# Altium PCB FS IA project.PcbDoc
Units mil, origin at the board's own origin, x right, y up, seen from the top; angles counter-clockwise.
Board outline 2371.06 x 649.61 mil, 2 copper layers (Top Layer, Bottom Layer), stack 65.792 mil thick; 5 components, 7 nets, 23 pads, 0 vias.
Unrouted connection lines stored in the file: 4.
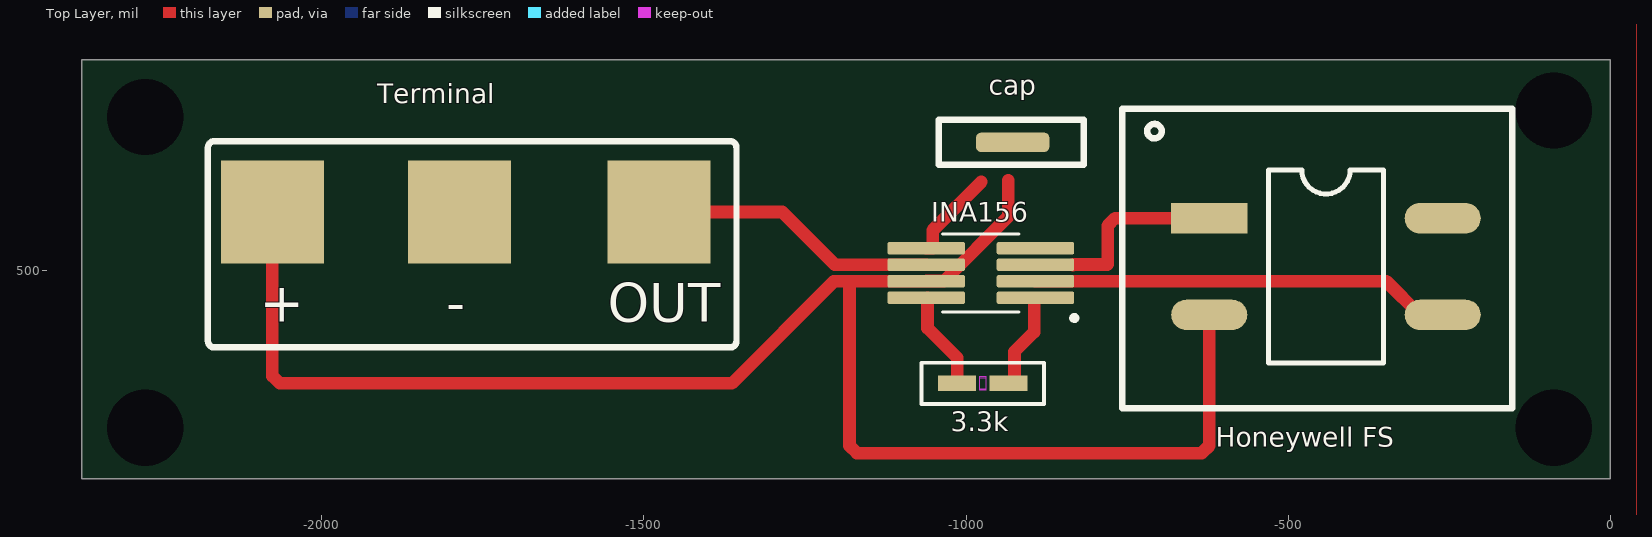
[diagram p0: Top Layer view]
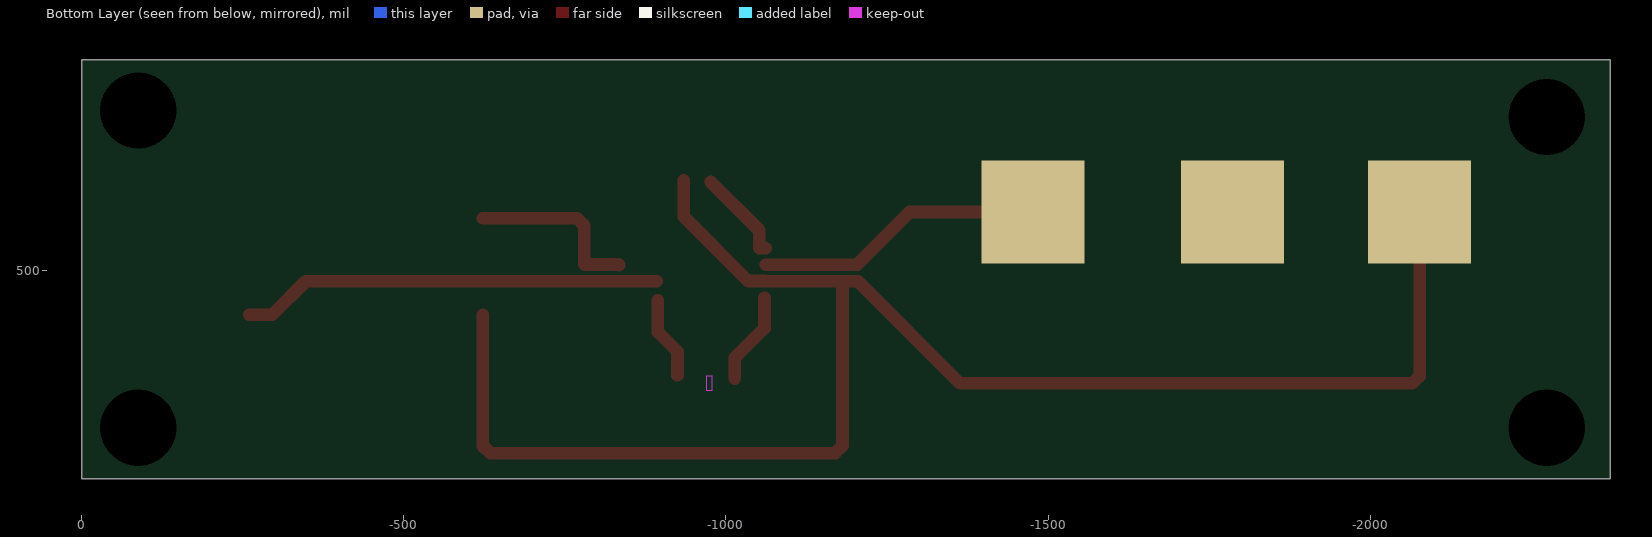
[diagram p1: Bottom Layer view, seen from below]

## Layer stack, top to bottom
Top Solder: solder mask 0.4, Solder Resist, Dk 3.5
Top Layer: signal copper 1.4
Dielectric 1: dielectric 62.9921, FR-4, Dk 4.8
Bottom Layer: signal copper 1.4
Bottom Solder: solder mask 0.4, Solder Resist, Dk 3.5

## Board outline
-2372.05,177.17 -0.98,177.17 -0.98,826.77 -2372.05,826.77

## Design rules (kind name [scope] priority, off if disabled: settings)
Clearance [All] p1: gap=0.4 ignorepadtopadclearanceinfootprint=TRUE
PolygonConnect [All] p1: connectstyle=Relief reliefconductorwidth=20 reliefentries=4 polygonreliefangle="90 Angle" airgapwidth=10
RoutingVias [All] p1: holewidth=28 width=50 viastyle="Through Hole" minholewidth=28 minwidth=50 maxholewidth=28 maxwidth=50
SolderMaskExpansion [All] p1: expansion=4 istentingtop=FALSE
Width [All] p1: maxlimit=29.53 minlimit=9.84 preferedwidth=19.68
30 further rules are at their usual default settings.

## Components (designator, comment, footprint, x,y, rotation, side; value= is the part's Value field where it differs from the comment)
3.3k "WR04X3301FTL" RES_WR04_WRE-M -974.41,324.8 r0 top
cap "CL05A104KA5NNNC" CAPC1005X55N -927.95,698.82 r180 top (schematic designator C?)
"Honeywell FS" "FSS010WNGR" "FSS010 - duplicate" -623.03,581.1 r0 top
INA156 "INA156EA/2K5" SOP65P490X110-8N -977.36,496.06 r180 top
Terminal "1935174" "SUPPLY TERMINAL" -2176.38,690.55 r0 top

## Footprints (in the part's own frame and the unit in brackets; to place one, negate y for a bottom-side part, rotate by r counter-clockwise, add the part's x,y. Pads: shape width x height; smd on the part's side, far side on the other; paste and mask are expansions set on the pad)
CAPC1005X55N [mil]
  rrect53% 80x30 smd: 1(-16.93,0) 2(16.93,0)
  silkscreen extent -110,-35 115,35, body extent -20,-10 20,10, height 22
"FSS010 - duplicate" [mm]
  rect 3x1.2 smd: 1(0,0)
  oval 3x1.2 smd: 2(0,-3.81) 3(9.2,-3.81) 4(9.2,0)
  silkscreen extent -3.43,-7.49 11.94,4.32
RES_WR04_WRE-M [mil]
  rect 59.06x24 smd paste+0 mask+0: 1(-40,0) 2(40,0)
  Top Layer keep-out region: -4.5,-9 -4.5,9 4.5,9 4.5,-9
  Keep-Out Layer region: -4.5,-11 -4.5,11 4.5,11 4.5,-11
  silkscreen extent -95,-32 95,32, body extent -21,-11 21,11, height 16
SOP65P490X110-8N [mm]
  rrect25% 3.048x0.48 smd: 1(-2.15,0.975) 2(-2.15,0.325) 3(-2.15,-0.325) 4(-2.15,-0.975) 5(2.15,-0.975) 6(2.15,-0.325) 7(2.15,0.325) 8(2.15,0.975)
  silkscreen extent -3.78,-1.54 1.5,1.88
"SUPPLY TERMINAL" [mil]
  rect 160x160 all layers, no hole: 1(100,-100) 2(390,-100) 3(700,-100)
  silkscreen extent 0,-310 820,10

## Part data
3.3k: "No Description Available", Mfr_Name=Walsin, Digi-Key_Part_Number_1=1292-WR04X3301FTLTR-ND, Digi-Key_Part_Number_2=1292-WR04X3301FTLCT-ND, Digi-Key_Part_Number_3=1292-WR04X3301FTLDKR-ND
cap: "0.1ÂµF Â±10% 25V Ceramic Capacitor X5R 0402 (1005 Metric)", Package="0402 Samsung", Check_prices=https://www.snapeda.com/parts/CL05A104KA5NNNC/Samsung%20Electro-Mechanics/view-part/553880/?ref=eda, Digi-Key_Part_Number=1276-1043-1-ND, MF="Samsung Electro-Mechanics", MP=CL05A104KA5NNNC, Purchase-URL=https://pricing.snapeda.com/search/part/CL05A104KA5NNNC/?ref=eda, SnapEDA_Link=https://www.snapeda.com/parts/CL05A104KA5NNNC/Samsung%20Electro-Mechanics/view-part/553880/?ref=snap
"Honeywell FS": "Force Sensor Ratiometric-OUT 4-Pin SMD T/R", Manufacturer="Honeywell Sensing & Control", Supplier Part Number=FSS010WNGR-ND, Category=Sensors, ComponentLink1Description=http://sensing.honeywell.com/index.php?ci_id=44994&src-supplier=Digi-Key, ComponentLink1URL=http://sensing.honeywell.com/index.php?ci_id=44994&src-supplier=Digi-Key, ComponentLink2Description=http://sensing.honeywell.com/index.php?ci_id=50144&src-supplier=Mouser, ComponentLink2URL=http://sensing.honeywell.com/index.php?ci_id=50144&src-supplier=Mouser, Manufacturer Part Number=FSS010WNGR, Pricing="25=88.7196 (USD)", RoHS=Yes, Supplier=Digi-Key
INA156 Terminal: Package=None, Availability=Unavailable, Price=None
  INA156: MP=INA156EA/2K5
  Terminal: MF="{'manufacturer': u'Phoenix Contact'}", MP=1935174

## Free pads (board coordinates)
  round 60 hole 118.11: 2(-88.58,748.03) 3(-2273.62,255.91) 4(-2273.62,738.19) 5(-88.58,255.91)

## Nets (pads, with @x,y where several pads share a name; then routed paths per layer and width w, separated by ;. In a path a pad name is that pad's centre, name@x,y a point inside that pad or via, vN(x,y) a via of type N, cw(c..) or ccw(c..) an arc to the next point about the centre after c; other vN are vias at no path point)
GND: "Honeywell FS.4" cap.2 INA156.5 Terminal.2 | length 144.2
  Top Layer w19.68: INA156.5 -1052.28,534.45 -1051.89,534.84 -1051.89,562.29 -976.59,637.58
Net3.3k_1: 3.3k.1 INA156.8 | length 144.2
  Top Layer w19.68: INA156.8@-1060.04,457.28 -1060.04,410.43 -1013.78,364.17 3.3k.1@-1013.78,332.25
Net3.3k_2: 3.3k.2 INA156.1 | length 128.8
  Top Layer w19.68: -925.2,337.54 -925.2,374.02 -894.69,404.53 INA156.1@-894.69,453.74
Output: INA156.6 Terminal.3 | length 458.1
  Top Layer w19.68: Terminal.3@-1486.22,590.55 Terminal.3 -1285.43,590.55 -1203.74,508.86 INA156.6
VIN+: "Honeywell FS.1" INA156.3 | length 276.2
  Top Layer w19.68: INA156.3@-834.25,508.46 -833.46,509.25 -781.21,509.25 -780.51,509.95 -780.51,569.57 -768.98,581.1 -623.03,581.1
VIN-: "Honeywell FS.3" INA156.2 | length 653.5
  Top Layer w19.68: INA156.2 -348.43,483.27 -296.26,431.1 -260.83,431.1
VSupply: "Honeywell FS.2" cap.1 INA156.7 Terminal.1 | length 2592.2
  Top Layer w19.68: Terminal.1 -2076.38,336.33 -2064.85,324.8 -1363.61,324.8 -1205.15,483.27 -1175.2,483.27 ; -935.04,639.76 -935.04,583.28 -1034.65,483.66 -1061.61,483.66 INA156.7 -1175.2,483.27 ; -623.03,431.1 -623.03,228.07 -634.56,216.54 -1169.57,216.54 -1181.1,228.07 -1181.1,477.36 -1175.2,483.27
pads on no net: INA156.4

## Polygon pours and split planes (outlines as drawn)
GND on Top Layer "GND_L01_P000" (solid, pour order 0): -2450.79,935.04 29.53,935.04 39.37,925.2 39.37,59.06 -2440.94,59.06 -2450.79,68.9

## Other copper
Top Layer:
  text "print footprint on paper and place components to ensure pads are large enough to solder" at -5195.71,1973.89 h60

## Text inside footprints (layer, text, board x,y; h text height)
Terminal: Top Overlay "-" at -1806.38,420.56 h60; Top Overlay "+" at -2096.38,420.55 h60; Top Overlay "OUT" at -1556.38,420.55 h60